# Altium PCB digital_ruler _new.PcbDoc
Units mm, origin at the board's own origin, x right, y up, seen from the top; angles counter-clockwise.
Board outline 71.5 x 46 mm, 2 copper layers (Top Layer, Bottom Layer), stack 1.1 mm thick; 41 components, 24 nets, 154 pads, 6 vias.
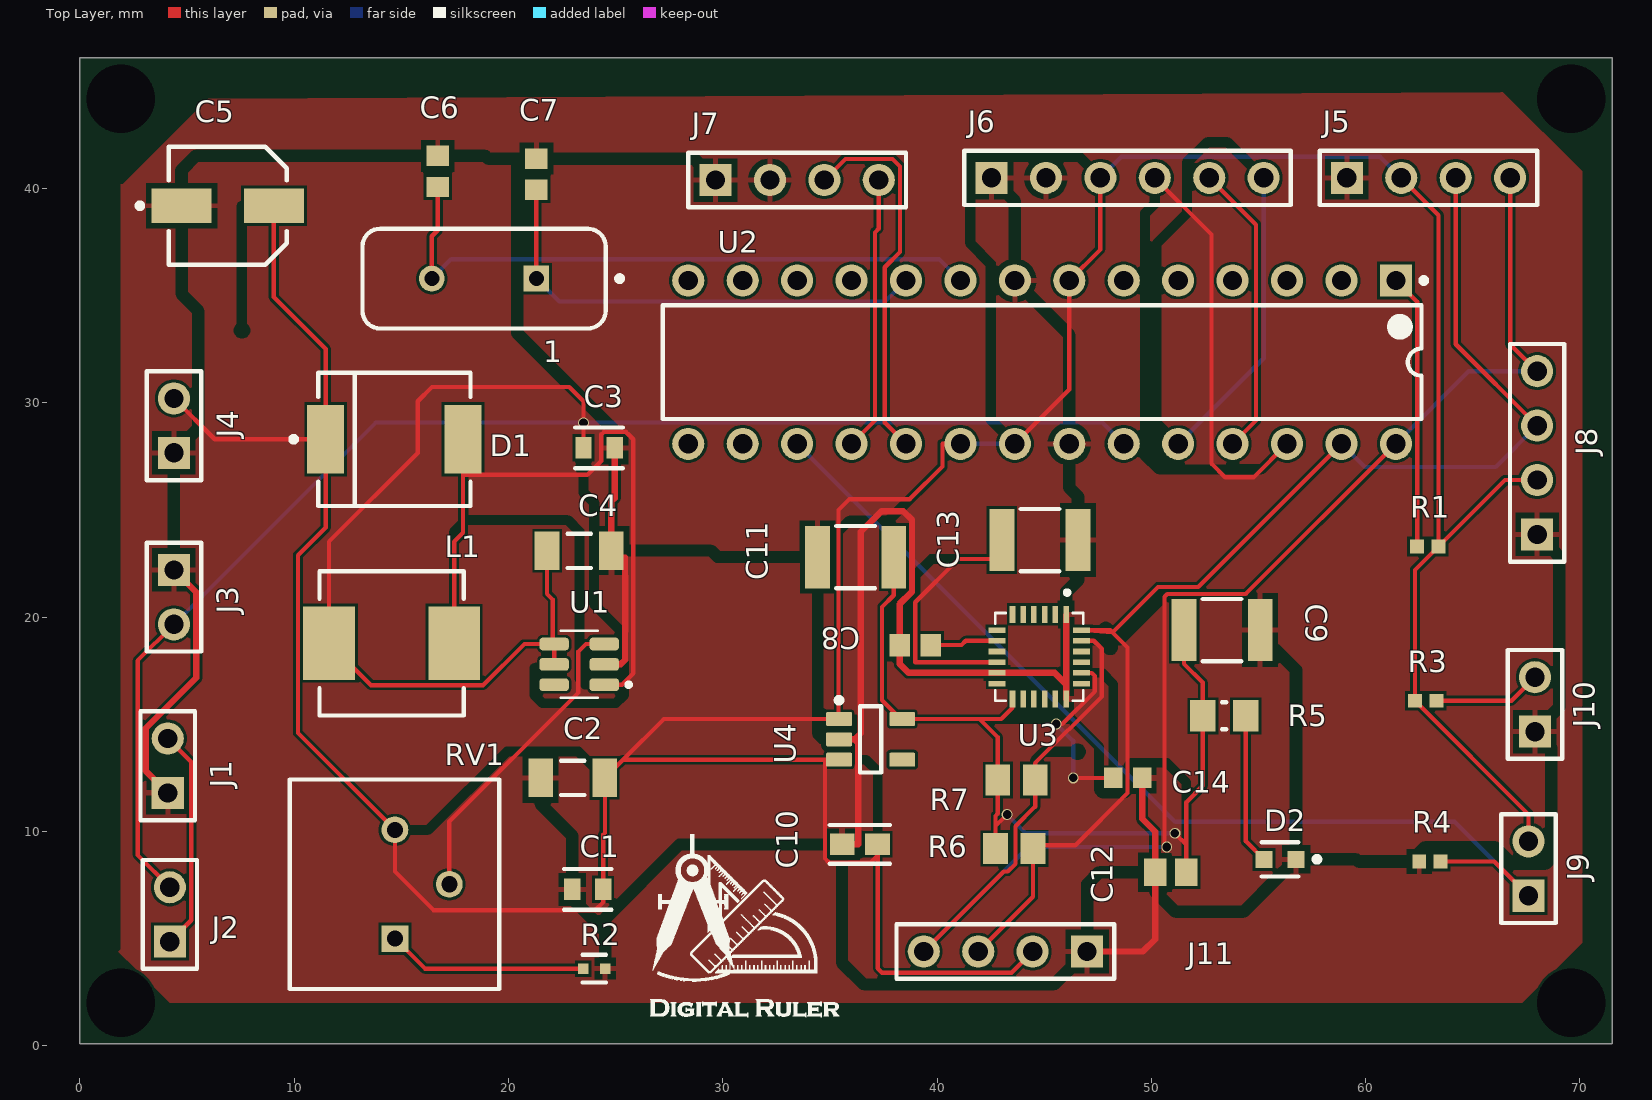
[diagram p0: Top Layer view]
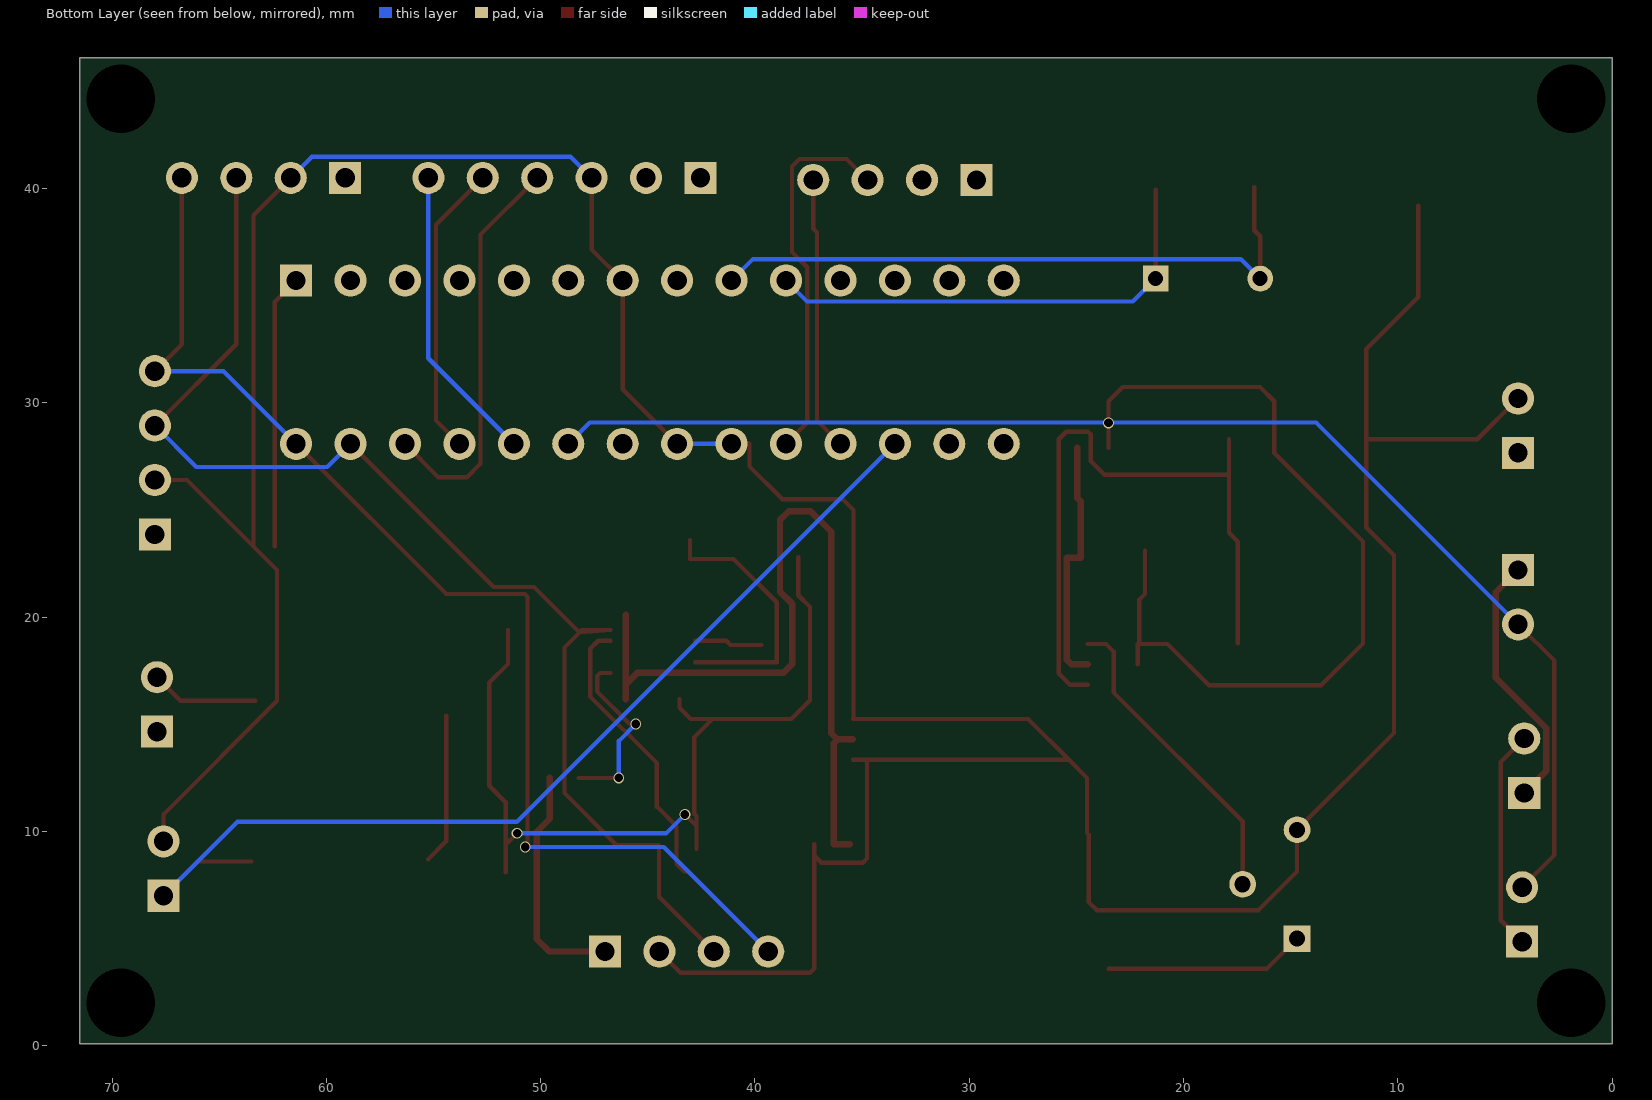
[diagram p1: Bottom Layer view, seen from below]
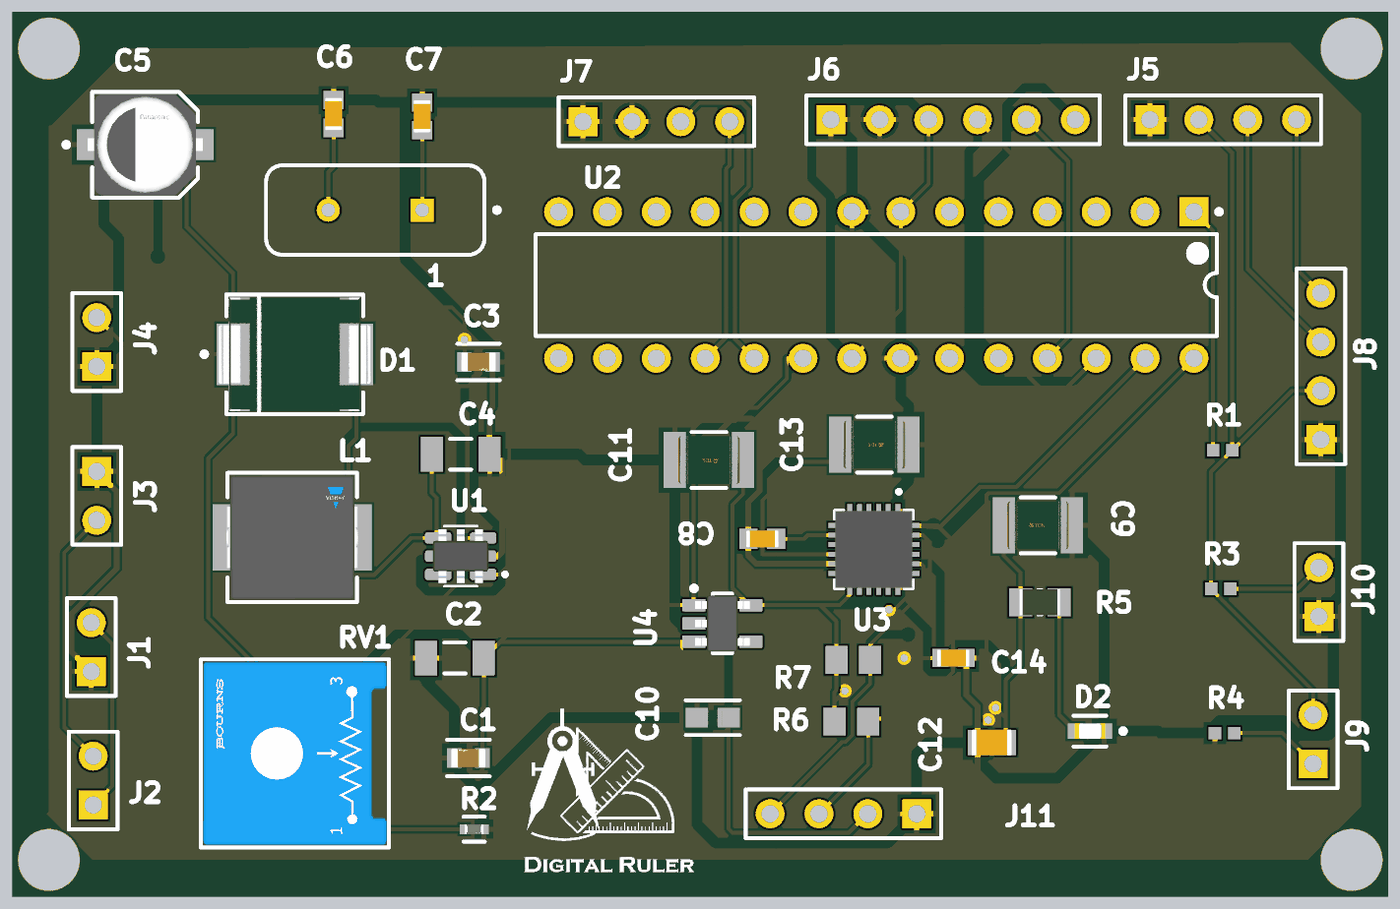
[diagram p2: 3D render of the assembled board from above, using the file's embedded part models]

## Layer stack, top to bottom
Top Solder: solder mask 0.05, Solder Resist, Dk 4
Top Layer: signal copper 0.1
Dielectric 1: dielectric 0.9, FR-4, Dk 4.8
Bottom Layer: signal copper 0.1
Bottom Solder: solder mask 0.05, Solder Resist, Dk 4

## Board outline
0,0.1 71.5,0.1 71.5,46.1 0,46.1

## Design rules (kind name [scope] priority, off if disabled: settings)
Clearance [All] p1: gap=0.127 ignorepadtopadclearanceinfootprint=FALSE
HoleSize [All] p1: absolutevalues=TRUE maxlimit=3.5 minlimit=0.025 maxpercent=80.000 minpercent=20.000
MinimumSolderMaskSliver [All] p1: minsoldermaskwidth=0.02
PolygonConnect [All] p1: connectstyle=Relief reliefconductorwidth=0.254 reliefentries=4 polygonreliefangle="90 Angle" airgapwidth=0.254
RoutingVias [All] p1: holewidth=0.4 width=0.5 viastyle="Through Hole" minholewidth=0.4 minwidth=0.5 maxholewidth=0.4 maxwidth=0.5
SilkToSilkClearance [All] p1: silktosilkclearance=0.127
SilkToSolderMaskClearance [IsPad] p1: minsilkscreentomaskgap=0.1 clearancetoexposedcopper=TRUE
SolderMaskExpansion [All] p1: expansion=0.102 istentingtop=FALSE
Width Width_PW [(InNet('3.3V') AND InNet('5V') OR InNet('GND'))] p1: maxlimit=0.3 minlimit=0.2 preferedwidth=0.3
Width [All] p2: maxlimit=0.5 minlimit=0.1 preferedwidth=0.2
26 further rules are at their usual default settings.

## Classes and differential pairs
component class "digital_ruler _new": 1 C1 C2 C6 C7 C8 C9 C10 C14 D1 D2 J1 J2 J3 J4 J5 J6 J7 J8 J9 J10 J11 L1 R1 R2 R4 RV1 U1 U3 U4

## Components (designator, comment, footprint, x,y, rotation, side; value= is the part's Value field where it differs from the comment)
1 "Osc" FOX-FOXSLF160-20 18.86,35.8 r180 top
C1 "20uF" FP-GRMJN7-0_1-IPC_C 23.7,7.3 r180 top
C2 "8.2uF" CAPC1206(3216)190_N 23,12.5 r0 top
C3 "20uF" FP-GRMJN7-0_1-IPC_C 24.227,27.9 r0 top
C4 "8.2uF" CAPC1206(3216)190_N 23.3,23.1 r180 top
C5 "10uF" FP-FKC-MFG 6.9,39.2 r0 top
C6 "22pF" CAPC1608X90X35ML10T15 16.7,40.8 r270 top
C7 "22pF" CAPC1608X90X35ML10T15 21.3,40.675 r270 top
C8 "0.01uF" CAPC1608X90X35ML10T15 38.975,18.7 r0 top
C9 "0.1uF" FP-CGA6P-IPC_A 53.3,19.4 r0 top
C10 "4.7uF" FP-CL10-IPC_A 36.4,9.4 r180 top
C11 "0.1uF" FP-CGA6P-IPC_A 36.2,22.8 r180 top
C12 "10uF" CAPC2013X95X50LL10T25 50.9,8.1 r0 top
C13 "0.1uF" FP-CGA6P-IPC_A 44.8,23.6 r180 top
C14 "2200pF" CAPC1608X90X35NL10T15 48.9,12.5 r180 top
D1 "SS34" FP-95402-MFG 14.675,28.302 r0 top
D2 "LED" FP-LTST-C193TBKT-5A-MFG 56,8.7 r180 top
J1 "PW_3.7V" HDR1X2 4.1,11.8 r90 top
J2 "SW" HDR1X2 4.2,4.86 r90 top
J3 "PWO_3.7V" HDR1X2 4.388,22.206 r270 top
J4 "PWI_5V" HDR1X2 4.388,27.667 r90 top
J5 "I2C" HDR1X4 59.12,40.5 r0 top
J6 "ENC" HDR1X6 42.54,40.5 r0 top
J7 "BTN" HDR1X4 29.66,40.4 r0 top
J8 "VL5301X" HDR1X4 68,23.86 r90 top
J9 "REC" HDR1X2 67.6,7 r90 top
J10 "TRS" HDR1X2 67.9,14.66 r90 top
J11 "MPU6050" HDR1X4 47,4.4 r180 top
L1 "22uH" FP-IHLP-2525CZ-FP_2_413x3-MFG 14.548,18.777 r0 top
R1 "10k" RESC1005X40X25ML05T05 62.9,23.3 r180 top
R2 "2.2k" FP-ERA2A-MFG 24,3.6 r180 top value=2.2kΩ
R3 "10k" RESC1005X40X25ML05T05 62.8,16.1 r0 top
R4 "10k" RESC1005X40X25ML05T05 63,8.6 r0 top
R5 "1K" RESC2013X60X35ML10T20 53.4,15.4 r0 top
R6 "4.7k" RESC2013X70X40NL20T20 43.6,9.2 r0 top
R7 "4.7k" RESC2013X70X40NL20T20 43.7,12.4 r0 top
RV1 "100K" FP-3386P-MFG 14.685,7.54 r90 top
U1 "MT3608" SOT95P280X145-6N 23.3,17.8 r180 top
U2 "ATmega" 28P3 44.9,31.9 r270 top
U3 "MPU-6050" QFN50P400X400X95-24N 44.77,18.15 r270 top
U4 "LDO" DBV0005A_M 36.9,14.3 r0 top

## Footprints (in the part's own frame and the unit in brackets; to place one, negate y for a bottom-side part, rotate by r counter-clockwise, add the part's x,y. Pads: shape width x height; smd on the part's side, far side on the other; paste and mask are expansions set on the pad)
28P3 [mm] "28-Pin Plastic Dual In-Line Package (PDIP)"
  rect 1.5x1.5 hole 0.9: 1(-3.81,16.51)
  round 1.5 hole 0.9: 2(-3.81,13.97) 3(-3.81,11.43) 4(-3.81,8.89) 5(-3.81,6.35) 6(-3.81,3.81) 7(-3.81,1.27) 8(-3.81,-1.27) 9(-3.81,-3.81) 10(-3.81,-6.35) 11(-3.81,-8.89) 12(-3.81,-11.43) 13(-3.81,-13.97) 14(-3.81,-16.51) 15(3.81,-16.51) 16(3.81,-13.97) 17(3.81,-11.43) 18(3.81,-8.89) 19(3.81,-6.35) 20(3.81,-3.81) 21(3.81,-1.27) 22(3.81,1.27) 23(3.81,3.81) 24(3.81,6.35) 25(3.81,8.89) 26(3.81,11.43) 27(3.81,13.97) 28(3.81,16.51)
  silkscreen extent -3.93,-17.7 2.65,17.94, body extent -3.6,-17.65 3.6,17.65, height 4.58
CAPC1206(3216)190_N [mm] "Chip Capacitor, Body 3.2x1.6mm, Height 1.9mm, IPC Medium Density"
  rect 1.15x1.8 smd: 1(-1.5,0) 2(1.5,0)
  silkscreen extent -0.55,-0.8 0.55,0.8, body extent -1.7,-0.9 1.7,0.9, height 1.9
CAPC1608X90X35ML10T15 [mm] "Chip Capacitor, 2-Leads, Body 1.7x0.9mm, IPC Low Density"
  rect 0.95x1.05 smd: 1(-0.725,0) 2(0.725,0)
  body extent -0.85,-0.45 0.85,0.45, height 0.9
CAPC1608X90X35NL10T15 [mm] "Chip Capacitor, 2-Leads, Body 1.7x0.9mm, IPC Medium Density"
  rect 0.85x0.95 smd: 1(-0.675,0) 2(0.675,0)
  body extent -0.85,-0.45 0.85,0.45, height 0.9
CAPC2013X95X50LL10T25 [mm] "Chip Capacitor, 2-Leads, Body 2.10x1.35mm, IPC High Density"
  rect 1.05x1.3 smd: 1(-0.725,0) 2(0.725,0)
  body extent -1.05,-0.67 1.05,0.67, height 0.95
DBV0005A_M [mm] "SOT23, 5-Leads, Body 3.05x1.75mm, Pitch 0.95mm, IPC Low Density"
  rrect15% 1.2x0.65 smd: 1(-1.475,0.95) 2(-1.475,0) 3(-1.475,-0.95) 4(1.475,-0.95) 5(1.475,0.95)
  silkscreen extent -1.6,-1.55 0.5,1.95, body extent -1.42,-1.46 1.42,1.46, height 1.08
FOX-FOXSLF160-20 [mm] "THD, 2-Leads, Body 11.35x4.65mm"
  rect 1.2x1.2 hole 0.7: 1(-2.44,0)
  round 1.2 hole 0.7: 2(2.44,0)
  silkscreen extent -6.45,-2.32 5.68,2.32, body extent -5.67,-2.32 5.68,2.33, height 3.6
FP-3386P-MFG [mm]
  rect 1.25x1.25 hole 0.75 paste-1000 mask+0: 1(-2.54,-0.015)
  round 1.25 hole 0.75 paste-1000 mask+0: 2(0,-2.555) 3(2.54,-0.015)
  silkscreen extent -4.89,-4.89 4.89,4.89, body extent -4.99,-4.99 4.99,4.99, height 0.25
FP-95402-MFG [mm]
  rect 1.72x3.2 smd paste+0 mask+0: 1(-3.205,0) 2(3.205,0)
  silkscreen extent -4.82,-3.11 3.55,3.11, body extent -4.17,-3.21 4.17,3.21, height 0.25
FP-CGA6P-IPC_A [mm]
  rect 1.153x2.904 smd paste+0 mask+0: 1(-1.775,0) 2(1.775,0)
  silkscreen extent -0.9,-1.45 0.9,1.45, body extent -2.85,-1.95 2.85,1.95, height 0.25
FP-CL10-IPC_A [mm]
  rect 1.158x1.012 smd paste+0 mask+0: 1(-0.827,0) 2(0.827,0)
  silkscreen extent -1.41,-0.91 1.41,0.91, body extent -1.91,-1.01 1.91,1.01, height 0.25
FP-ERA2A-MFG [mm]
  rect 0.475x0.5 smd paste+0 mask+0: 1(-0.513,0) 2(0.513,0)
  silkscreen extent -0.55,-0.65 0.55,0.65, body extent -0.85,-0.4 0.85,0.4, height 0.25
FP-FKC-MFG [mm]
  rect 2.8x1.6 smd paste+0 mask+0: 1(-2.15,0) 2(2.15,0)
  silkscreen extent -4.22,-2.75 2.75,2.75, body extent -3.8,-3 3.8,3, height 0.25
FP-GRMJN7-0_1-IPC_C [mm]
  rect 0.759x1.012 smd paste+0 mask+0: 1(-0.727,0) 2(0.727,0)
  silkscreen extent -1.11,-0.95 1.11,0.95, body extent -1.21,-0.65 1.21,0.65, height 0.25
FP-IHLP-2525CZ-FP_2_413x3-MFG [mil]
  rect 95x135 smd paste+0 mask+0: 1(-115,0) 2(115,0)
  silkscreen extent -132,-132 132,132, body extent -166,-136 166,136, height 10
FP-LTST-C193TBKT-5A-MFG [mm]
  rect 0.8x0.8 smd paste+0 mask+0: 1(-0.75,0) 2(0.75,0)
  silkscreen extent -1.85,-0.8 0.85,0.8, body extent -1.25,-0.55 1.25,0.55, height 0.25
HDR1X2 [mm] "Connector; Header; 2 Position"
  rect 1.5x1.5 hole 0.9: 1(0,0)
  round 1.5 hole 0.9: 2(2.54,0)
  silkscreen extent -1.27,-1.27 3.81,1.27
HDR1X4 [mm] "Connector; Header; 4 Position"
  rect 1.5x1.5 hole 0.9: 1(0,0)
  round 1.5 hole 0.9: 2(2.54,0) 3(5.08,0) 4(7.62,0)
  silkscreen extent -1.27,-1.27 8.89,1.27
HDR1X6 [mm] "Connector; Header; 6 Position"
  rect 1.5x1.5 hole 0.9: 1(0,0)
  round 1.5 hole 0.9: 2(2.54,0) 3(5.08,0) 4(7.62,0) 5(10.16,0) 6(12.7,0)
  silkscreen extent -1.27,-1.27 13.97,1.27
QFN50P400X400X95-24N [mm]
  rect 0.79x0.26 smd: 1(-1.97,1.25) 2(-1.97,0.75) 3(-1.97,0.25) 4(-1.97,-0.25) 5(-1.97,-0.75) 6(-1.97,-1.25) 13(1.97,-1.25) 14(1.97,-0.75) 15(1.97,-0.25) 16(1.97,0.25) 17(1.97,0.75) 18(1.97,1.25)
  rect 0.26x0.79 smd: 7(-1.25,-1.97) 8(-0.75,-1.97) 9(-0.25,-1.97) 10(0.25,-1.97) 11(0.75,-1.97) 12(1.25,-1.97) 19(1.25,1.97) 20(0.75,1.97) 21(0.25,1.97) 22(-0.25,1.97) 23(-0.75,1.97) 24(-1.25,1.97)
  silkscreen extent -3.1,-2.05 2.05,2.05, body extent -2,-2 2,2, height 0.93
RESC1005X40X25ML05T05 [mm] "Chip Resistor, 2-Leads, Body 1.00x0.50mm, IPC Low Density"
  rect 0.65x0.65 smd: 1(-0.5,0) 2(0.5,0)
  body extent -0.53,-0.27 0.53,0.28, height 0.4
RESC2013X60X35ML10T20 [mm] "Chip Resistor, 2-Leads, Body 2.1x1.35mm, IPC Low Density"
  rect 1.2x1.45 smd: 1(-1,0) 2(1,0)
  silkscreen extent -0.1,-0.63 0.1,0.63, body extent -1.05,-0.68 1.05,0.67, height 0.6
RESC2013X70X40NL20T20 [mm] "Chip Resistor, 2-Leads, Body 2.2x1.35mm, IPC Medium Density"
  rect 1.15x1.45 smd: 1(-0.875,0) 2(0.875,0)
  body extent -1.1,-0.72 1.1,0.72, height 0.7
SOT95P280X145-6N [mm]
  rrect50% 1.37x0.59 smd: 1(-1.17,0.95) 2(-1.17,0) 3(-1.17,-0.95) 4(1.17,-0.95) 5(1.17,0) 6(1.17,0.95)
  silkscreen extent -2.4,-1.57 0.85,1.56, body extent -1.45,-1.4 1.45,1.4, height 1.45

## Part data
1: library part CMP-1749-00003-1, "Resistance Weld Thru-Hole Crystal, 16 MHz, -20 to 70 degC, 2-Pin THD, RoHS, Bulk", Case\Package=Axial, Max Operating Temperature="155 degC", Min Operating Temperature="-55 degC", Package Quantity=200, Power Rating="250 mW", Resistance="221 kohm", Tolerance=1%, Voltage Rating="250 V", ComponentLink1Description="Manufacturer URL", ComponentLink1URL=http://www.foxonline.com/, ComponentLink2Description=Datasheet, ComponentLink2URL=http://www.foxonline.com/pdfs/hc49slf.pdf, DatasheetVersion=Mar-15, Length="0.248 inch", Mount="Through Hole", PackageDescription="2-Pin Through Hole Device, Body 11.35 x 4.65 mm", PackageReference=FOXSLF160-20, Packaging=Bulk, RoHSCompliant=true
C1 C3: library part CMP-06035-061017-1, "Chip Multilayer Ceramic Capacitors for General Purpose, 0704, 20uF, X5R, 15%, 20%, 16V"
C2 C4: library part CMP-1037-04959-1, "CAP 8.2uF 16V ±20% 1206 (3216 Metric) Thickness 1.9mm SMD", Case-EIA=1206, Case-Metric=3216, Rated Voltage="16 V", Tolerance=Â±20%, Max Thickness="1.9 mm", Technology=SMT
C5: library part CMP-05427-000030-1, "CAP ALUM 10UF 20% 50V SMD", Case/Package=Radial, Dielectric Material=Aluminium, ESR (Equivalent Series Resistance)=1.52R, Leakage Current=3uA, Max Operating Temperature=105°C, Min Operating Temperature=-55°C, Package Quantity=1000, Ripple Current=85mA, Tolerance=20%, Voltage=50V, Capacitance=10uF, Construction=Cylindrical, Contact Plating=Tin, Diameter=5mm, Height=5.8mm, Height - Seated (Max)=0.228inch, Impedance=1.52R, Lead Free="Lead Free", Length=5.8mm, Life (Hours)=2000Hour, Material=Aluminium, Mount="Surface Mount", Number of Pins=2, Packaging="Tape and Reel", Radiation Hardening=No, REACH SVHC="No SVHC", Ripple Current (AC)=85mA, RoHS Compliant=Yes, Series=FK, Termination=SMD/SMT, Voltage Rating=50V, Voltage Rating (DC)=50V, Width=6.5mm
C6 C7: library part CMP-2000-04945-1, "Chip Capacitor, 22 pF, +/- 5%, 50 V, -55 to 125 degC, 0603 (1608 Metric), RoHS, Tape and Reel", Case Size/Dimension=0603, Dielectric=C0G, Manufacturer=Murata, Package Description="2-Pin Surface Mount Device, Body 1.6 x 0.8 mm", Package Reference=603, Rated Voltage=50V, Tolerance (%)=±5%, Capacitance=22pF, Datasheet URL=https://datasheet.ciiva.com/11786/0900766b807a1cab-11786398.pdf, Datasheet Version=Jul-06, Manufacturer URL=http://www.murata.com/
C8: library part CMP-2100-03642-1, "Chip Capacitor, 10 nF, +/- 10%, 50 V, -55 to 125 degC, 0603 (1608 Metric), RoHS, Tape and Reel", Capacitance=10nF, Case Code (Imperial)=0603, Case Code (Metric)=1608, Dielectric=X7R, Dielectric Material=Ceramic, Insulation Resistance=10GR, Manufacturer=Murata, Max Operating Temperature=125degC, Min Operating Temperature=-55degC, Package Description="2-Pin Surface Mount Device, Body 1.6 x 0.8 mm", Package Quantity=1, Tolerance=10%, Voltage=50V, Case/Package=0603, Datasheet URL=http://search.murata.co.jp/Ceramy/image/img/A01X/G101/ENG/GRM188R71H103KA01-01.pdf, Datasheet Version=42401.0, Depth=0.8mm, Height=0.8mm, Lead Free=LeadFree, Length=1.6mm, Manufacturer URL=http://www.murata.com/, Material=Ceramic, Mount=SurfaceMount, Number of Pins=2, Package Reference=0603, Packaging=TapeandReel, REACH SVHC=Unknown, RoHSCompliant=True, Termination=SMD/SMT, Thickness=0.035inch, Voltage Rating=50V, Voltage Rating (DC)=50V, Width=0.031inch
C9 C11 C13: library part CMP-08246-002289-1, "Cap Ceramic 100nF 250V X7R 10% Pad SMD 1210 +125°C Automotive T/R", Capacitance=100nF, Case Code (Imperial)=1210, Case Code (Metric)=3225, Dielectric=X7R, Max Operating Temperature=125°C, Min Operating Temperature=-55°C, Package Quantity=1, Ratings=AEC-Q200, Tolerance=10%, Voltage Rating=250V, Case/Package=1210, Depth=2.5mm, Features="Soft Termination", Height=2mm, Length=3.2mm, Mount="Surface Mount", Packaging="Tape and Reel", Termination=SMD/SMT, Thickness=0.087inch, Voltage Rating (DC)=250V, Weight=0.000564oz, Width=0.098inch
C10: library part CMP-13271-001817-1, "Cap Ceramic 4.7uF 6.3V X6S ±10% Pad SMD 0603 +105°C T/R", Case Code (Imperial)=0603, Case Code (Metric)=1608, Dielectric=X6S, Max Operating Temperature=105°C, Min Operating Temperature=-55°C, Package Quantity=1, Tolerance=10%, Voltage Rating=6.3V, Capacitance=4.7uF, Case/Package=0603, Depth=0.8mm, Height=0.8mm, Lead Free="Lead Free", Length=1.6mm, Mount="Surface Mount", Packaging="Tape and Reel", Radiation Hardening=No, Thickness=0.035inch, Voltage Rating (DC)=6.3V, Width=0.031inch
C12: library part CMP-2000-06497-1, "Chip Capacitor, 10 uF, +/- 10%, 6.3 V, -55 to 85 degC, 0805 (2012 Metric), RoHS, Tape and Reel", Capacitance=10µF, Manufacturer="Taiyo Yuden", Operating Temperature=-55°C~85°C, Package / Case=0805(2012Metric), Package Description="2-Pin Surface Mount Device, Body 2 x 1.25 mm", Package Reference=0805, PCN Part Number=X5R,X7RDielectrics23/Jan/2008, Ratings=-, Standard Package=1, Temperature Coefficient=X5R, Tolerance=±10%, Voltage - Rated=6.3V, Applications=GeneralPurpose, Catalog Drawings=xMKSeries_0805_0.85, Category=Capacitors, Datasheet URL=http://www.yuden.co.jp/productdata/catalog/en/mlcc_all_e.pdf, Datasheet Version=09/2015, Family=CeramicCapacitors, Features=-, Height - Seated (Max)=-, Lead Spacing=-, Lead Style=-, Manufacturer URL=http://www.t-yuden.com/, Mounting Technology=SurfaceMount, Mounting Type=SurfaceMount,MLCC, Online Catalog=MSeries, Other Names=587-1304-6, Packaging=Digi-Reel®, Series=M, Size / Dimension="0.079\"Lx0.049\"W(2.00mmx1.25mm)", Thickness (Max)="0.037\"(0.95mm)"
C14: library part CMP-2006-02908-5, "Chip Capacitor, 2.2 nF, +/- 10%, 50 V, -55 to 125 degC, 0603 (1608 Metric), RoHS, Tape and Reel", Manufacturer=Murata, Max Operating Temperature="125 degC", Min Operating Temperature="-55 degC", Package Quantity=4000, Voltage Rating="50 V", ComponentLink1Description="Manufacturer URL", ComponentLink1URL=http://www.murata.com/, ComponentLink2Description=Datasheet, ComponentLink2URL=http://search.murata.co.jp/Ceramy/image/img/A01X/G101/ENG/GRM188R71H222KA01-01.pdf, DatasheetVersion=02/2016, Height="0.8 mm", Lead Pitch="4 mm", Length="1.6 mm", Mount="Surface Mount", Mounting Technology="Surface Mount", PackageDescription="2-Pin Surface Mount Device, Body 1.6 x 0.8 mm", PackageReference=0603, Packaging="Tape and Reel", Pins=2, REACH SVHC="No SVHC", RoHSCompliant=true
D1: library part CMP-02539-000012-1, "DIODE SCHOTTKY 40V 3A DO214AB", Forward Current=3A, Manufacturer=Vishay, Manufacturer Part Number=SS34-E3/57T, Max Junction Temp=+150°C, Max Repetitive Reverse Voltage=40V, Max Surge Forward Current=100A, Package=95402, Peak Reverse Current=0.5mA, Temperature="-55°C to +150°C", Temperature Range Low=-55°C, Automotive=No, Category=Diode, ComponentLink2Description=Datasheet, ComponentLink2URL=http://www.vishay.com/docs/88751/ss32.pdf, Device Class L1="Discrete Semiconductors", Device Class L2=Diodes, Device Class L3="Schottky Diodes", Digikey Description="DIODE SCHOTTKY 40V 3A DO214AB", Footprint Url=http://www.vishay.com/docs/95402/smc.pdf, Height=2.62mm, Lead Free=Yes, Mouser Description="Schottky Diodes & Rectifiers 3.0 Amp 40 Volt", Octopart=https://octopart.com/ss34-e3%2F57t-vishay-39552907, RoHS=TRUE, Standoff Height=0mm, Temperature Range High=+150°C
D2: library part CMP-2000-06624-2, "LED BLUE CLEAR CHIP SMD", Case Code (Imperial)=0603, Case Code (Metric)=1608, Color=Blue, Forward Current=20mA, Forward Voltage=2.8V, Lens Color=Colorless, Max Operating Temperature=80°C, Min Operating Temperature=-20°C, Package Quantity=1, Power Dissipation=76mW, Reverse Voltage=5V, Test Current=5mA, Case/Package=0603, Depth=0.8mm, Dominant Wavelength=475nm, Height=0.35mm, Illumination Color=Blue, Lead Free="Lead Free", Length=1.6mm, Lens Style=Diffused, Lens Transparency=Clear, Luminous Intensity=15mcd, Mount="Surface Mount", Number of Elements=1, Number of LEDs=1, Number of Pins=2, Packaging="Tape and Reel", Radiation Hardening=No, RoHS Compliant=Yes, Viewing Angle=130°, Width=0.8mm
J1 J2 J3 J4 J9 J10: library part "Header 2", "Header, 2-Pin", LatestRevisionDate=17-Jul-2002, LatestRevisionNote="Re-released for DXP Platform.", Publisher="Altium Limited"
J5 J7 J8 J11: library part "Header 4", "Header, 4-Pin", LatestRevisionDate=17-Jul-2002, LatestRevisionNote="Re-released for DXP Platform.", Publisher="Altium Limited"
J6: library part "Header 6", "Header, 6-Pin", LatestRevisionDate=17-Jul-2002, LatestRevisionNote="Re-released for DXP Platform.", Publisher="Altium Limited"
L1: library part CMP-2000-06442-2, "Commercial Inductors, Low DCR Series 22uH 2.9A 135mΩ 20%", Case Code (Imperial)=2525, Case Code (Metric)=6363, Current Rating=2.9A, DC Resistance (DCR)=135mR, Inductance Tolerance=20%, Max Operating Temperature=125°C, Min Operating Temperature=-55°C, Package Quantity=2000, Saturation Current=2.5A, Self Resonant Frequency=1MHz, Test Frequency=100kHz, Case/Package=2525, Contact Plating=Tin, Core Material=Ferrite, Depth=6.72mm, Height=3mm, Height - Seated (Max)=0.118inch, Inductance=22uH, Lead Free="Lead Free", Length=7.24mm, Max DC Current=2.9A, Military Standard=Not, Mount="Surface Mount", Number of Pins=2, Packaging="Tape and Reel", Radiation Hardening=No, RMS Current (Irms)=2.9A, Shielding=Shielded, Termination=SMD/SMT, Tolerance=20%, Width=0.255inch
R1 R3 R4: library part CMP-2002-00433-1, Manufacturer=Panasonic, Part Number=ERJ-2GEJ103X
R2: library part CMP-2002-05881-2, "RES SMD 2.2K OHM 0.1% 1/16W 0402", Manufacturer=Panasonic, Manufacturer Part Number=ERA-2AEB222X, Package=ERA2A, Power Rating=0.063W, Resistance=2.2kΩ, Temperature="-55°C to +155°C", Temperature Coefficient=25ppm/°C, Temperature Range High=+155°C, Temperature Range Low=-55°C, Tolerance=0.1%, Voltage Rating=50V, Automotive=Yes, Automotive Grade="Grade 0", Category=Res, ComponentLink2Description=Datasheet, ComponentLink2URL=https://industrial.panasonic.com/cdbs/www-data/pdf/RDM0000/AOA0000C307.pdf, Composition="Metal Film", Device Class L1="Passive Components", Device Class L2=Resistors, Device Class L3="Chip SMD Resistors", Digikey Description="RES SMD 2.2K OHM 0.1% 1/16W 0402", Footprint Url=https://b2b-api.panasonic.eu/file_stream/pids/fileversion/1079, Height=0.4mm, Ipc Land Pattern Name=RESC10050X35, Lead Free=Yes, Mouser Description="Thin Film Resistors - SMD 0402 1/16W 2.2Kohms", Octopart=https://octopart.com/era-2aeb222x-panasonic-9251391, RoHS=TRUE, Series=E24
R5: library part CMP-2100-03671-1, "Chip Resistor, 1 KOhm, +/- 1%, 125 mW, -55 to 155 degC, 0805 (2012 Metric), RoHS, Tape and Reel", Case Code (Imperial)=0805, Case Code (Metric)=2012, Manufacturer=Yageo, Max Operating Temperature=155degC, Max Power Dissipation=125mW, Min Operating Temperature=-55degC, Package Description="2-Pin Surface Mounted Device, Body 2 x 1.25 mm", Package Quantity=1, Resistance=1KOhm, Temperature Coefficient=100ppm/degreesC, Tolerance=1%, Voltage Rating=150V, Case/Package=0805, Composition=ThickFilm, Datasheet URL=http://www.yageo.com/NewPortal/yageodocoutput?fileName=/pdf/R-Chip/PYu-RC_Group_51_RoHS_L_5.pdf, Datasheet Version="Rev. 5, 10/2016", Depth=1.25mm, Height=0.024inch, Lead Free=LeadFree, Length=0.079inch, Manufacturer URL=http://www.yageo.com/, Military Standard=Not, Number of Pins=2, Number of Terminations=2, Package Reference=0805, Packaging=TapeandReel, Power Rating=125mW, REACH SVHC=Unknown, RoHSCompliant=true, Termination=SMD/SMT, Voltage Rating (DC)=150V, Width=0.049inch
R6 R7: library part CMP-2001-00550-5, "Chip Resistor, 4.7 KOhm, +/- 1%, 0.125 W, -55 to 155 degC, 0805 (2012 Metric), RoHS, Tape and Reel", Manufacturer=Panasonic, Max Operating Temperature="155 degC", Min Operating Temperature="-55 degC", Package Quantity=5000, Voltage Rating="150 V", ComponentLink1Description="Manufacturer URL", ComponentLink1URL=http://www.panasonic.com/, ComponentLink2Description=Datasheet, ComponentLink2URL=http://industrial.panasonic.com/cdbs/www-data/pdf/RDA0000/AOA0000C86.pdf, DatasheetVersion=04/2015, Height="0.6 mm", Length="2 mm", Mount="Surface Mount", Mounting Technology="Surface Mount", PackageDescription="2-Pin Surface Mount Device, Body 2 x 1.25 mm", PackageReference=0805, Packaging="Tape and Reel", Pins=2, REACH SVHC=Yes, RoHSCompliant=true
RV1: library part CMP-2000-05592-8, "TRIMMER 100K OHM 0.5W PC PIN TOP", Color=Blue, Manufacturer Series=3386, Max Operating Temperature=125°C, Max Power Dissipation=500mW, Min Operating Temperature=-55°C, Package Quantity=100, Resistance=100kR, Resistance Law=Linear, Resistance Tolerance=10%, Resistor Type=Cermet, Temperature Coefficient=100ppm/°C, Voltage Rating=300V, Actuator Orientation=Vertical, Actuator Type=SCREW, Contact Plating=Tin, Depth=9.53mm, Height=4.83mm, Lead Free="Contains Lead", Length=9.53mm, Military Standard=Not, Mount="Through Hole", Number of Pins=3, Number of Terminals/Pins=3, Number of Turns=1, Packaging=Rail/Tube, Power Rating=500mW, Radiation Hardening=No, Reach SVHC Compliant=Yes, RoHS Compliant=Yes, Series="Trimpot® 3386 - Sealed", Taper=Linear, Technology=CERMET, Terminal Finish=Tin, Termination=Pin, Tolerance=10%, Type=Potentiometer, Weight=0.03oz, Width=9.53mm
U1: "High Efficiency 1.2MHz 2A Step Up Converter", Package=None, Availability=Unavailable, MF="{'manufacturer': u'Aerosemi Technology Co., Ltd'}", MP=MT3608, Price=None
U2: library part CMP-0095-00013-2, "8-bit AVR Microcontroller, 32KB Flash, 1KB EEPROM, 2KB SRAM, 28-pin PDIP, Industrial Grade (-40°C to 85°C)", ComponentLink1Description="Manufacturer URL", ComponentLink1URL=http://www.atmel.com/, ComponentLink2Description="ATmega48A/48PA/88A/88PA/168A/168PA/328/328P Datasheet", ComponentLink2URL=http://www.atmel.com/dyn/resources/prod_documents/8271.pdf, ComponentLink3Description="ATmega48A/48PA/88A/88PA/168A/168PA/328/328P Summary", ComponentLink3URL=http://www.atmel.com/dyn/resources/prod_documents/8271S.pdf, DatasheetVersion="revD, May-2011", PackageDescription="28-lead (0.300\"/7.62mm Wide) Plastic Dual Inline Package (PDIP)", PackageReference=28P3, PackageVersion="revB, Sep-2001", RevisionNote="DatasheetVersion updated. URLs added."
U3: "MPU-6050 Six-Axis (Gyro + Accelerometer) MEMS MotionTrackingâ„¢ Devices", Package=None, Availability=Unavailable, MF="{'manufacturer': u'TDK InvenSense'}", MP=MPU-6050, Price=None
U4: library part CMP-0394-00692-2, "Single Output LDO, 100 mA, Fixed 3.3 V Output, 3.68 to 16 V Input, with Low IQ, 5-pin SOT-23 (DBV), -40 to 125 degC, Green (RoHS & no Sb/Br)", Manufacturer="Texas Instruments", PartNumber=TPS76133DBVT, Accuracy(%)=2, Code_JEDEC=MO-178, ComponentLink1Description="Manufacturer URL", ComponentLink1URL=http://www.ti.com/, ComponentLink2Description=Datasheet, ComponentLink2URL=http://www.ti.com/general/docs/lit/getliterature.tsp?genericPartNumber=TPS76133&fileType=pdf, ComponentLink3Description="Package Specification", ComponentLink3URL=http://www.ti.com/litv/pdf/mpds018i, DatasheetVersion=SLVS178B, Eco-Plan="Green (RoHS & no Sb/Br)", Fixed Output Options(V)=3.3, Iout(Max)(A)=0.1, Iq(Typ)(mA)=2.6, Mounting Technology="Surface Mount", PackageDescription="5-Pin Plastic Small Outline, Body 1.60 Ãƒâ€” 2.90 mm, Pitch 0.95 mm", PackageReference=DBV0005A, PackageVersion=4073253-4/K, SubFamily="Single Channel LDO", Vdo(Typ)(mV)=170, Vin(Max)(V)=16, Vin(Min)(V)=3.68, Vout Adj(Max)(V)=3.3, Vout Adj(Min)(V)=3.3

## Free pads (board coordinates)
  round 1.524 hole 3.2: 5(1.9,2) 6(69.6,2) 7(69.6,44.2) 8(1.9,44.2)

## Via types
v1: diameter 0.5, hole 0.4, Top Layer to Bottom Layer, 6 vias

## Nets (pads, with @x,y where several pads share a name; then routed paths per layer and width w, separated by ;. In a path a pad name is that pad's centre, name@x,y a point inside that pad or via, vN(x,y) a via of type N, cw(c..) or ccw(c..) an arc to the next point about the centre after c; other vN are vias at no path point)
3.3V: C9.1 C11.1 C12.2 R5.1 R6.1 R7.1 U3.13 U4.5 | length 42.1
  Top Layer w0.2: C11.1 37.975,21.02 37.433,20.479 37.433,16.122 38.306,15.25 U4.5 41.98,15.25 ; R6.1 42.725,10.25 ; v1(43.268,10.792) 42.725,10.25 ; U3.13 43.52,15.774 42.996,15.25 41.98,15.25 ; v1(51.099,9.912) 51.625,9.386 ; C9.1 51.525,17.823 52.4,16.948 R5.1 52.4,12.135 51.625,11.36 51.625,9.386 ; C12.2 51.625,9.386 ; 41.98,15.25 42.825,14.405 R7.1 42.825,10.825 42.725,10.725 42.725,10.25
  Bottom Layer w0.2: v1(43.268,10.792) 44.147,9.912 v1(51.099,9.912)
3.7V: C3.1 C4.2 J2.2 J3.2 L1.1 U1.4 U1.5 U2.23 | length 103.3
  Top Layer w0.2: J2.2 2.696,8.904 2.696,17.974 J3.2 ; C4.2 21.8,21.088 22.06,20.829 U1.4@22.06,18.75 ; U1.5 U1.4 U1.4@22.06,18.75 ; C3.1 v1(23.5,29.064) 23.5,30.08 22.84,30.74 16.428,30.74 15.767,30.08 15.767,27.667 11.627,23.527 L1.1 13.583,16.821 18.815,16.821 20.744,18.75 U1.4@22.06,18.75
  Bottom Layer w0.2: J3.2 13.811,29.089 v1@23.525,29.089 ; v1(23.5,29.064) v1@23.525,29.089 ; U2.23 47.711,29.089 v1@23.525,29.089
5V: C1.1 C2.2 C5.2 C10.1 D1.1 J4.2 J5.2 J6.3 J8.2 J9.2 J11.2 R1.1 R3.1 RV1.3 U2.7 U2.20 U2.21 U4.1 U4.3 | length 190.7
  Top Layer w0.2: J4.2 6.293,28.302 D1.1 ; C5.2 9.05,34.938 11.47,32.518 D1.1 ; U4.3 34.766,13.35 ; U4.1 U4.1@35.401,15.25 ; C10.1 37.227,8.868 ; U2.20 40.253,28.09 40.253,27.032 38.729,25.508 35.909,25.508 35.401,25 U4.1@35.401,15.25 ; U2.21 46.17,30.63 U2.7 47.62,37.16 J6.3 ; J11.2 43.47,3.41 37.433,3.41 37.227,3.616 37.227,8.868 ; J5.2 63.4,38.76 R1.1 ; J9.2 67.6,10.8 R3.1 62.3,22.2 R1.1 ; J8.2 66.5,26.4 R1.1 ; D1.1 11.47,24.183 10.179,22.892 10.179,14.601 RV1.3 14.7,8.135 16.504,6.331 24.046,6.331 24.427,6.712 C1.1 24.427,9.862 24.5,9.935 C2.2 25.35,13.35 ; 25.35,13.35 34.766,13.35 ; 25.35,13.35 27.25,15.25 U4.1@35.401,15.25 ; 34.766,13.35 34.766,8.744 34.97,8.541 36.9,8.541 37.227,8.868
  Bottom Layer w0.2: U2.20 U2.21 ; J6.3 48.605,41.485 60.675,41.485 J5.2
A1: J6.6 U2.24 | length 14.1
  Bottom Layer w0.2: U2.24 55.24,32.08 J6.6
A2: J6.5 U2.25 | length 13.8
  Top Layer w0.2: J6.5 54.883,38.317 54.883,29.183 U2.25
A3: J6.4 U2.26 | length 18.9
  Top Layer w0.2: J6.4 52.8,37.86 52.8,27.167 53.443,26.524 54.764,26.524 U2.26
D11: J9.1 R4.2 U2.17 | length 47.6
  Top Layer w0.2: R4.2 66,8.6 J9.1
  Bottom Layer w0.2: U2.17 51.107,10.453 64.147,10.453 J9.1
D12: J7.4 U2.18 | length 12.8
  Top Layer w0.2: U2.18 37.103,29.183 37.103,37.954 37.28,38.131 J7.4
D13: J7.3 U2.19 | length 17.7
  Top Layer w0.2: J7.3 35.723,41.383 37.916,41.383 38.272,41.027 38.272,37.04 37.56,36.328 37.56,29.08 U2.19
GND: C1.2 C2.1 C3.2 C4.1 C5.1 C6.1 C7.1 C8.1 C9.2 C10.2 C11.2 C12.1 C13.1 C14.1 D2.1 J1.1 J3.1 J4.1 J5.1 J6.1 J6.2 J7.1 J7.2 J8.1 J10.1 J11.1 R2.1 R4.1 U1.2 U2.8 U2.22 U3.1 U3.11 U3.18 U4.2 | length 73.3
  Top Layer w0.3: J1.1 3.073,12.827 3.073,14.82 5.429,17.177 5.429,21.165 J3.1 ; U1.2 25.23,17.8 25.445,18.015 25.445,22.765 24.8,22.765 C4.1 24.8,25.406 24.953,25.56 C3.2 ; U4.2 36.138,14.3 ; C10.2 36.316,9.4 36.316,14.122 36.138,14.3 ; U3.18 46.02,16.872 ; U3.1 46.02,16.872 ; J11.1 49.6,4.4 50.175,4.975 C12.1 50.175,9.989 49.575,10.589 C14.1 ; 36.138,14.3 36.157,14.3 36.443,14.586 36.443,23.984 37.408,24.949 38.424,24.949 38.829,24.545 38.829,21.19 38.25,20.611 C8.1 38.25,17.828 38.678,17.4 U3.11 45.492,17.4 46.02,16.872
NetC8_2: C8.2 U3.8 | length 3.2
  Top Layer w0.2: C8.2 41.142,18.7 41.342,18.9 U3.8
NetC13_2: C13.2 U3.10 | length 12.4
  Top Layer w0.2: U3.10 38.983,17.9 38.983,20.694 41.003,22.714 43.025,22.714 C13.2
NetC14_2: C14.2 U3.20 | length 8.5
  Top Layer w0.2: v1(45.561,15.018) 45.841,15.018 47.362,16.539 47.362,17.253 47.215,17.4 U3.20 ; v1(46.349,12.5) C14.2
  Bottom Layer w0.2: v1(45.561,15.018) 46.349,14.23 v1(46.349,12.5)
NetD1_2: D1.2 L1.2 U1.1 | length 31.8
  Top Layer w0.2: L1.2 17.469,23.527 17.88,23.938 17.88,26.651 ; D1.2 17.88,26.651 ; U1.1 25.296,16.85 25.826,17.38 25.826,28.302 25.47,28.658 24.454,28.658 24.327,28.531 24.327,27.286 23.692,26.651 17.88,26.651
NetD2_2: D2.2 R5.2 | length 7.1
  Top Layer w0.2: R5.2 54.4,9.55 D2.2
NetJ10_2: J10.2 R3.2 | length 5.1
  Top Layer w0.2: R3.2 66.8,16.1 J10.2
NetR1_2: R1.2 U2.1 | length 12.8
  Top Layer w0.2: U2.1 62.4,34.72 R1.2
NetR2_2: R2.2 RV1.1 | length 9.4
  Top Layer w0.2: RV1.1 16.1,3.6 R2.2
NetRV1_2: RV1.2 U1.3 | length 14.7
  Top Layer w0.2: RV1.2 17.24,10.471 23.26,16.491 23.26,18.396 23.614,18.75 U1.3
PB6: 1.2 C6.2 U2.9 | length 29.9
  Top Layer w0.2: 1.2 16.42,37.776 16.7,38.056 C6.2
  Bottom Layer w0.2: 1.2 17.329,36.709 40.091,36.709 U2.9
PB7: 1.1 C7.2 U2.10 | length 22.3
  Top Layer w0.2: 1.1 C7.2
  Bottom Layer w0.2: 1.1 22.372,34.728 37.568,34.728 U2.10
SCL: J5.4 J8.4 J11.4 R7.2 U2.28 U3.23 | length 75.1
  Top Layer w0.2: J11.4 43.114,8.134 43.301,8.134 43.656,8.49 43.656,10.243 44.575,11.161 R7.2 44.575,13.189 47.689,16.303 47.689,18.525 47.314,18.9 U3.23 ; v1(50.718,9.277) 50.616,9.379 50.616,20.952 50.743,21.079 54.399,21.079 U2.28 ; J5.4 66.74,32.74 J8.4
  Bottom Layer w0.2: J11.4 44.257,9.277 v1(50.718,9.277) ; U2.28 64.8,31.48 J8.4
SDA: J5.3 J8.3 J11.3 R6.2 U2.27 U3.24 | length 60
  Top Layer w0.2: J11.3 44.475,6.955 R6.2 44.475,9.354 46.45,9.354 48.889,11.792 48.889,18.587 48.191,19.285 ; U2.27 52.186,21.406 50.312,21.406 48.191,19.285 ; J5.3 64.2,32.74 J8.3 ; 48.191,19.285 48.076,19.4 U3.24 48.191,19.285
  Bottom Layer w0.2: U2.27 59.953,27.007 66.067,27.007 J8.3
sw: J1.2 J2.1 | length 10.4
  Top Layer w0.2: J1.2 5.201,13.239 5.201,5.861 J2.1
pads on no net: U1.6 U2.2 U2.3 U2.4 U2.5 U2.6 U2.11 U2.12 U2.13 U2.14 U2.15 U2.16 U3.2 U3.3 U3.4 U3.5 U3.6 U3.7 U3.9 U3.12 U3.14 U3.15 U3.16 U3.17 U3.19 U3.21 U3.22 U4.4

## Polygon pours and split planes (outlines as drawn)
GND on Top Layer "GND_L01_P-001" (solid, pour order 0): 6,44.2 2,40.2 1.9,40.2 1.9,4.5 1.8,4.4 4.2,2 67.3,2 70.1,4.8 70.1,40.8 66.4,44.5 66.3,44.5

## Silkscreen, mask and mechanical layers (free items; w line width, h text height)
Top Overlay:
  drawing of 14 lines, arcs and shapes, not listed
Mechanical 1:
  lines w0.254: 0.1,46.1 0.1,0.2 71.4,0.2 71.4,46 0.2,46